# EAGLE board mcboard (EAGLE 9.6.2)
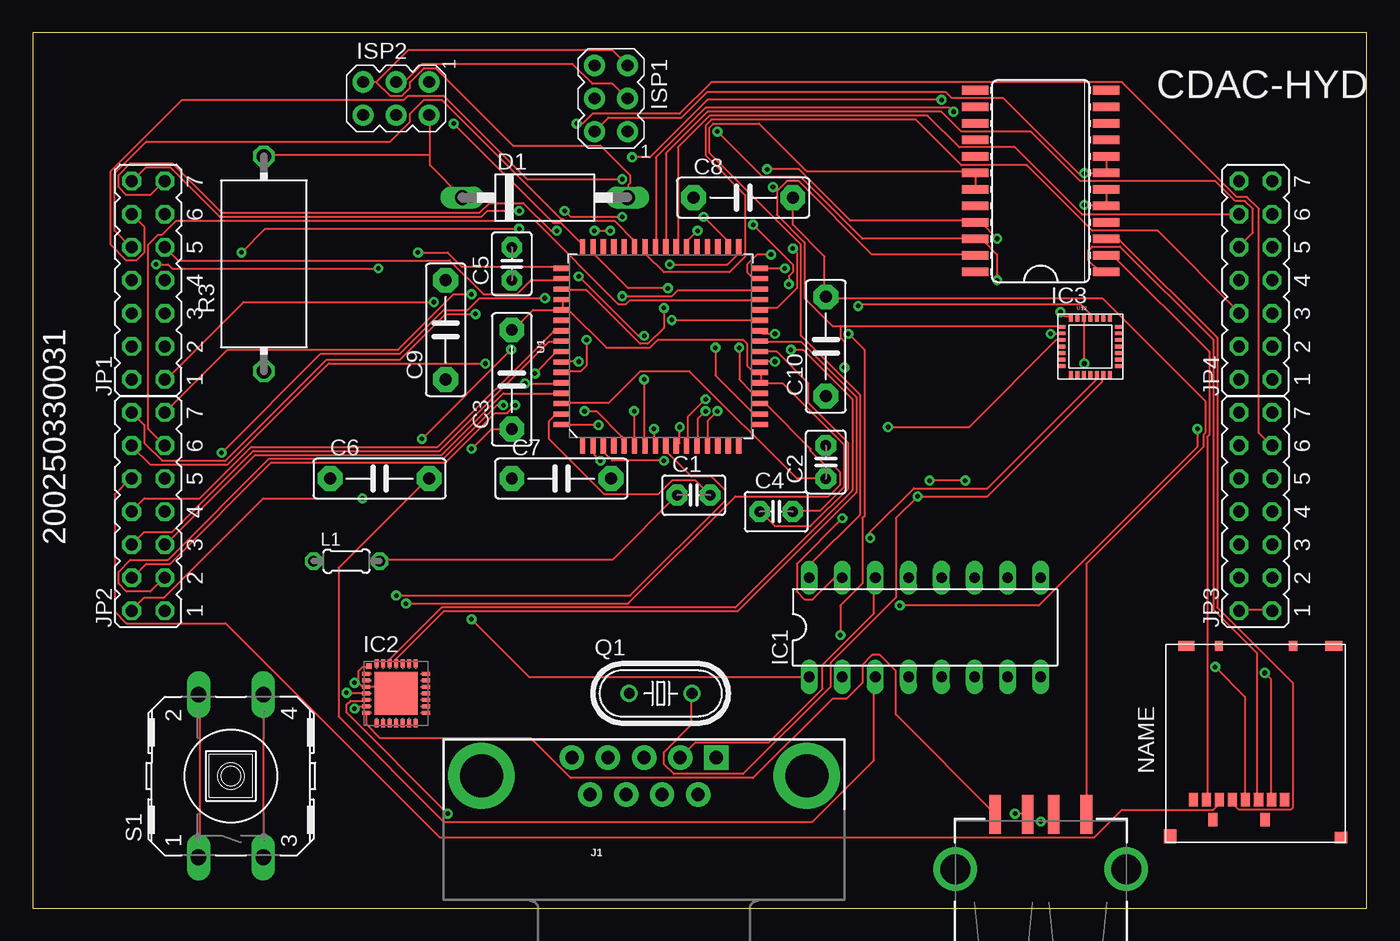
[diagram p0: board, top side]
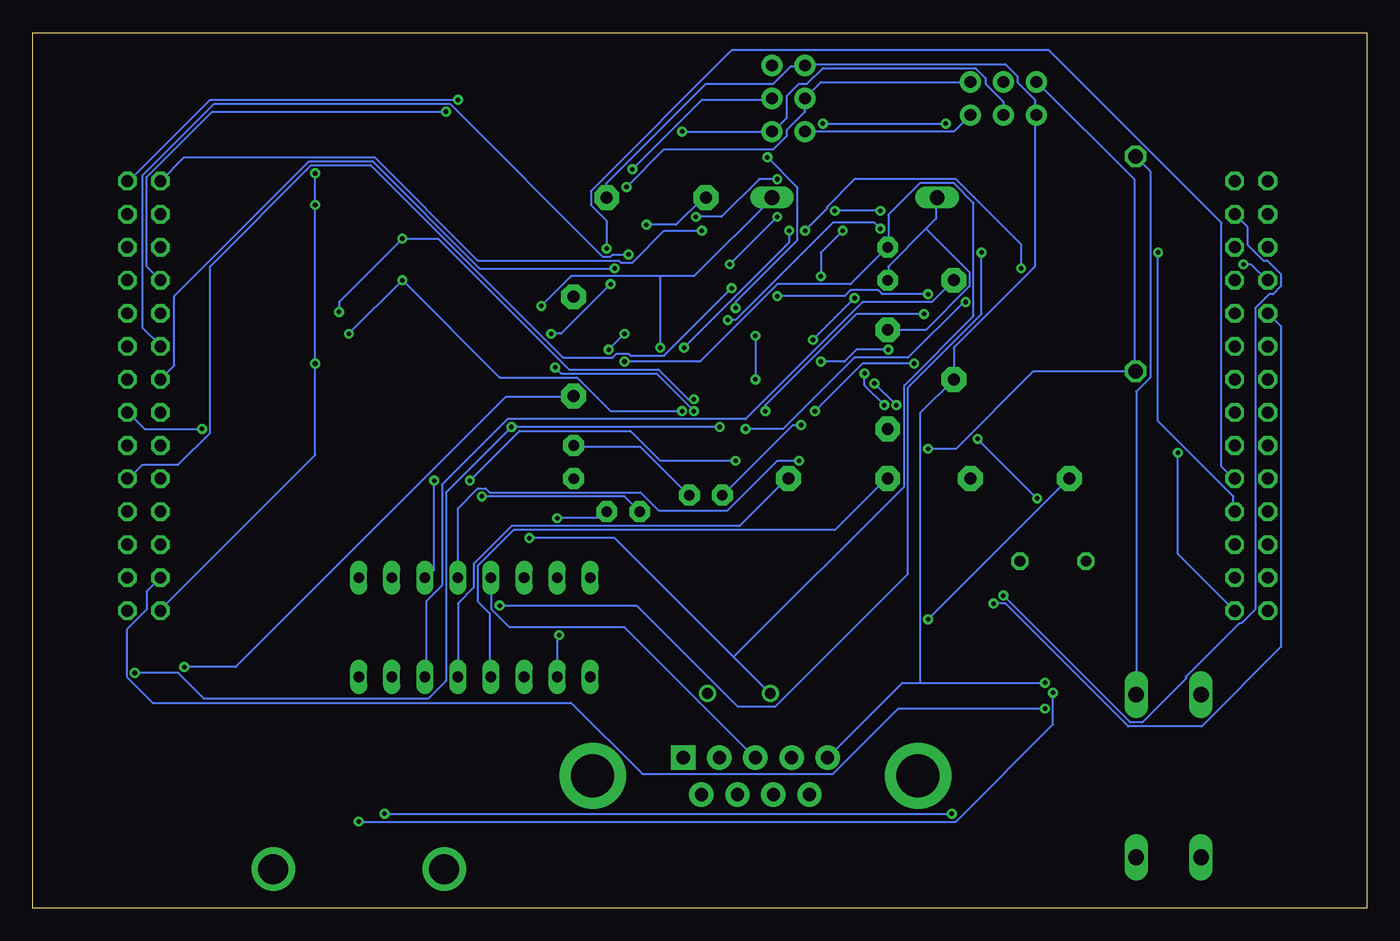
[diagram p1: board, bottom side, seen from below]

Size 102.54 x 67.3 mm. Coordinates in mm from the lower left corner, seen from the top.
Outline: 0,0 102.54,0 102.54,67.3 0,67.3 0,0
Copper layers (1*16): Top 0.035mm / dielectric 1.5mm / Bottom 0.035mm
Design rules "default": minimum track width 6mil, minimum drill 0.35mm, track to track 6mil, track to pad 6mil, pad to pad 6mil, via to via 6mil, smd to smd 6mil, copper to edge 40mil, drill to drill 6mil, minimum pad ring 10mil, minimum via ring 8mil, stop-mask expansion 4mil, vias tented up to drill 0mil, thermal gap 10mil

## Footprints (pad centres in the part's own frame; a part is rotated, then mirrored left to right if it is on the bottom)
C2.5-3 = drill 0.813 pad 1.6 octagon: 1 -1.27,0; 2 1.27,0
C7.5B3 = drill 0.914 pad 1.905 octagon: 1 -3.81,0; 2 3.81,0
DO15-12 = drill 1.118 long: A 6.35,0; C -6.35,0
DIL16 = drill 0.813 long: 1 -8.89,-3.81; 2 -6.35,-3.81; 3 -3.81,-3.81; 4 -1.27,-3.81; 5 1.27,-3.81; 6 3.81,-3.81; 7 6.35,-3.81; 8 8.89,-3.81; 9 8.89,3.81; 10 6.35,3.81; 11 3.81,3.81; 12 1.27,3.81; 13 -1.27,3.81; 14 -3.81,3.81; 15 -6.35,3.81; 16 -8.89,3.81
MLP28 = smd 0.6 x 0.3: 1 -2.3,1.5; 2 -2.3,1; 3 -2.3,0.5; 4 -2.3,0; 5 -2.3,-0.5; 6 -2.3,-1; 7 -2.3,-1.5; 15 2.3,-1.5; 16 2.3,-1; 17 2.3,-0.5; 18 2.3,0; 19 2.3,0.5; 20 2.3,1; 21 2.3,1.5 | smd 0.3 x 0.6: 8 -1.5,-2.3; 9 -1,-2.3; 10 -0.5,-2.3; 11 0,-2.3; 12 0.5,-2.3; 13 1,-2.3; 14 1.5,-2.3; 22 1.5,2.3; 23 1,2.3; 24 0.5,2.3; 25 0,2.3; 26 -0.5,2.3; 27 -1,2.3; 28 -1.5,2.3 | smd 3.3 x 3.3: EXP 0,0 | smd 0.435 x 0.435: M -2.103,2.103
SO24W = smd 0.66 x 2.032: 1 -6.985,-5.029; 2 -5.715,-5.029; 3 -4.445,-5.029; 4 -3.175,-5.029; 5 -1.905,-5.029; 6 -0.635,-5.029; 7 0.635,-5.029; 8 1.905,-5.029; 9 3.175,-5.029; 10 4.445,-5.029; 11 5.715,-5.029; 12 6.985,-5.029; 13 6.985,5.029; 14 5.715,5.029; 15 4.445,5.029; 16 3.175,5.029; 17 1.905,5.029; 18 0.635,5.029; 19 -0.635,5.029; 20 -1.905,5.029; 21 -3.175,5.029; 22 -4.445,5.029; 23 -5.715,5.029; 24 -6.985,5.029
AVRISP = drill 0.9 pad 1.626: 1 -1.27,2.54; 2 1.27,2.54; 3 -1.27,0; 4 1.27,0; 5 -1.27,-2.54; 6 1.27,-2.54
DB9 = drill 1.016 pad 1.88 square: 1 -5.54,-1.42 | drill 1.016 pad 1.88: 2 -2.77,-1.42; 3 0,-1.42; 4 2.77,-1.42; 5 5.54,-1.42; 6 -4.15,1.42; 7 -1.38,1.42; 8 1.38,1.42; 9 4.15,1.42 | drill 3.302 pad 5.08: G1 -12.5,0; G2 12.5,0
USB-A-S-SILK-FEMALE = smd 3 x 0.9: D+ 7.212,-1; D- 7.212,1; GND 7.212,-3.5; VBUS 7.212,3.5 | drill 2.311: SHLD1 3,-6.566; SHLD2 3,6.566
JP7Q = drill 0.914 octagon: 1 -7.62,-1.27; 2 -7.62,1.27; 3 -5.08,-1.27; 4 -5.08,1.27; 5 -2.54,-1.27; 6 -2.54,1.27; 7 0,-1.27; 8 0,1.27; 9 2.54,-1.27; 10 2.54,1.27; 11 5.08,-1.27; 12 5.08,1.27; 13 7.62,-1.27; 14 7.62,1.27
0204/5 = drill 0.813 octagon: 1 -2.54,0; 2 2.54,0
HC49U-V = drill 0.813: 1 -2.413,0; 2 2.413,0
VTA55 = drill 1.1 octagon: 1 -8.255,0; 2 8.255,0
RACON12 = drill 1.194 long: 1 -6.248,2.489; 2 6.248,2.489; 3 -6.248,-2.489; 4 6.248,-2.489
TQFP64_14X14MM = smd 0.4 x 1.27: 1 -6,-7.6; 2 -5.2,-7.6; 3 -4.4,-7.6; 4 -3.6,-7.6; 5 -2.8,-7.6; 6 -2,-7.6; 7 -1.2,-7.6; 8 -0.4,-7.6; 9 0.4,-7.6; 10 1.2,-7.6; 11 2,-7.6; 12 2.8,-7.6; 13 3.6,-7.6; 14 4.4,-7.6; 15 5.2,-7.6; 16 6,-7.6; 33 6,7.6; 34 5.2,7.6; 35 4.4,7.6; 36 3.6,7.6; 37 2.8,7.6; 38 2,7.6; 39 1.2,7.6; 40 0.4,7.6; 41 -0.4,7.6; 42 -1.2,7.6; 43 -2,7.6; 44 -2.8,7.6; 45 -3.6,7.6; 46 -4.4,7.6; 47 -5.2,7.6; 48 -6,7.6 | smd 1.27 x 0.4: 17 7.6,-6; 18 7.6,-5.2; 19 7.6,-4.4; 20 7.6,-3.6; 21 7.6,-2.8; 22 7.6,-2; 23 7.6,-1.2; 24 7.6,-0.4; 25 7.6,0.4; 26 7.6,1.2; 27 7.6,2; 28 7.6,2.8; 29 7.6,3.6; 30 7.6,4.4; 31 7.6,5.2; 32 7.6,6; 49 -7.6,6; 50 -7.6,5.2; 51 -7.6,4.4; 52 -7.6,3.6; 53 -7.6,2.8; 54 -7.6,2; 55 -7.6,1.2; 56 -7.6,0.4; 57 -7.6,-0.4; 58 -7.6,-1.2; 59 -7.6,-2; 60 -7.6,-2.8; 61 -7.6,-3.6; 62 -7.6,-4.4; 63 -7.6,-5.2; 64 -7.6,-6
SD-CARD = smd 0.7 x 1.05: P$1 2.225,3.275; P$2 1.225,3.275; P$3 0.225,3.275; P$4 -0.775,3.275; P$5 -1.775,3.275; P$6 -2.775,3.275; P$7 -3.775,3.275; P$8 -4.775,3.275; P$9 0.725,1.725; P$10 -3.275,1.725 | smd 0.95 x 1.1: P$11 -6.575,0.45 | smd 0.95 x 0.9: P$12 6.575,0.35 | smd 1.2 x 0.75: P$13 -5.325,15.075 | smd 1.3 x 0.75: P$14 6.025,15.075 | smd 0.65 x 0.75: P$15 2.875,15.075; P$16 -2.825,15.075
CC2520 = smd 0.6 x 0.3: P$1 -2.2,1.5; P$2 -2.2,1; P$3 -2.2,0.5; P$4 -2.2,0; P$5 -2.2,-0.5; P$6 -2.2,-1; P$7 -2.2,-1.5; P$15 2.2,-1.5; P$16 2.2,-1; P$17 2.2,-0.5; P$18 2.2,0; P$19 2.2,0.5; P$20 2.2,1; P$21 2.2,1.5 | smd 0.3 x 0.6: P$8 -1.5,-2.2; P$9 -1,-2.2; P$10 -0.5,-2.2; P$11 0,-2.2; P$12 0.5,-2.2; P$13 1,-2.2; P$14 1.5,-2.2; P$22 1.5,2.2; P$23 1,2.2; P$24 0.5,2.2; P$25 0,2.2; P$26 -0.5,2.2; P$27 -1,2.2; P$28 -1.5,2.2

## Placement (x,y rotation side)
C1  [C2.5-3]  50.8,31.75 0 top
C2  [C2.5-3]  60.96,34.29 90 top
C3  [C7.5B3]  36.83,40.64 90 top
C4  [C2.5-3]  57.15,30.48 0 top
C5  [C2.5-3]  36.83,49.53 90 top
C6  [C7.5B3]  26.67,33.02 0 top
C7  [C7.5B3]  40.64,33.02 0 top
C8  [C7.5B3]  54.61,54.61 0 top
C9  [C7.5B3]  31.75,44.45 90 top
C10  [C7.5B3]  60.96,43.18 90 top
D1  EGP20A  [DO15-12]  39.37,54.61 0 top
IC1  MAX232  [DIL16]  68.58,21.59 0 top
IC2  CP2101  [MLP28]  27.94,16.51 0 top
IC3  74AC11244D  [SO24W]  77.47,55.88 90 top
ISP1  AVRISP-6  [AVRISP]  44.45,62.23 180 top
ISP2  AVRISP-6  [AVRISP]  27.94,62.23 270 top
J1  [DB9]  46.99,10.16 180 top
J2  USB_A_SMT_FEMALE  [USB-A-S-SILK-FEMALE]  77.47,0 90 top
JP1  [JP7Q]  8.89,48.26 90 top
JP2  [JP7Q]  8.89,30.48 90 top
JP3  [JP7Q]  93.98,30.48 90 top
JP4  [JP7Q]  93.98,48.26 90 top
L1  [0204/5]  24.13,26.67 0 top
Q1  [HC49U-V]  48.26,16.51 0 top
R3  [VTA55]  17.78,49.53 90 top
S1  RACON12  [RACON12]  15.24,10.16 90 top
U1  ATMEGA128-SMD  [TQFP64_14X14MM]  48.26,43.18 0 top
U$1  SD-CARD  [SD-CARD]  93.98,5.08 0 top
U$2  [CC2520]  81.28,43.18 0 top

## Library data of the parts
C1-C10 = capacitor-wima
D1 = diode
IC1 = maxim; MF: MAXIM; MPN: MAX232ACPE+; OC_FARNELL: 9723773; OC_NEWARK: 68K4544
IC2 = silabs; MF: FARNELL; MPN: CP2102-GM; OC_FARNELL: 9282130; OC_NEWARK: 30K5635
IC3 = 74ac-logic
ISP1 ISP2 = adafruit
J1 = SparkFun-Connectors; PROD_ID: CONN-08194
J2 = SparkFun-Connectors; PROD_ID: CONN-09520; SF_ID: PRT-09011
JP1-JP4 = jumper
L1 = rcl; SPICEPREFIX: L
Q1 = crystal; OC_FARNELL: 1666969; OC_NEWARK: unknown
R3 = rcl; SPICEPREFIX: R
S1 = switch-misc
U1 = SparkFun-IC-Microcontroller
U$1 = SD-CARD
U$2 = CC2520

## Nets
3.3V: C10.1 U$1.P$4
5V: C3.2 C4.2 C5.1 D1.C IC1.15 IC3.5 IC3.6 IC3.7 IC3.8 ISP1.2 ISP2.2 JP3.1 JP3.2 R3.2 S1.3 S1.4 U1.21 U1.22 U1.52 U1.53 U$2.P$26
GND: C8.2 C9.1 C10.2 IC2.3 IC2.EXP IC2.M ISP1.6 ISP2.6 J1.5 J2.GND
N$1: C2.1 U1.62
N$2: C1.2 C2.2 U1.63
N$3: C1.1 L1.2 U1.64
N$4: L1.1
N$5: S1.1 S1.2
N$6: C6.1 IC1.1
N$7: U1.10 U$1.P$2 U$2.P$3
N$8: C4.1 Q1.2 U1.24 U$2.P$13
N$9: C5.2 Q1.1 U1.23 U$2.P$12
N$10: IC3.22 ISP1.1 ISP2.4 U1.13 U$2.P$2
N$11: IC3.23 ISP1.4 ISP2.1 U1.12 U$2.P$1
N$12: IC3.21 ISP1.3 ISP2.3 U1.11 U$2.P$28
N$13: C9.2 IC1.6
N$14: C8.1 IC1.2
N$15: C7.1 IC1.4
N$16: C6.2 IC1.3
N$17: C7.2 IC1.5
N$18: IC2.25 U1.25
N$19: IC1.11 U1.3
N$20: IC1.12 U1.2
N$21: IC3.3 U$1.P$5
N$22: JP2.5 U1.61
N$23: IC2.5 J2.D-
N$24: JP2.3 U1.60
N$25: IC2.4 J2.D+
N$26: IC2.7 J2.VBUS
N$27: IC1.14 J1.2
N$28: IC1.13 J1.3
N$29: C3.1 D1.A ISP1.5 ISP2.5 R3.1 U1.20 U$2.P$25
N$30: IC2.26 U1.26
N$31: IC3.1 U$1.P$3
N$32: IC3.2 U$1.P$7
N$33: JP2.12 U1.5
N$34: JP2.14 U1.6
N$35: JP4.2 U1.32
N$36: JP4.4 U1.31
N$37: JP4.12 U1.39
N$38: JP4.10 U1.40
N$39: JP4.8 U1.41
N$40: JP4.6 U1.42
N$41: JP4.13 U1.51
N$42: JP1.11 U1.9
N$43: JP1.1 U1.8
N$44: JP1.13 U1.7
N$45: JP1.9 U1.50
N$46: JP4.14 U1.38
N$48: JP1.14 U1.33
N$49: JP1.12 U1.34
N$50: JP1.10 U1.43
N$51: JP1.8 U1.18
N$52: JP1.6 U1.19
N$53: JP2.13 U1.30
N$54: JP2.11 U1.29
N$55: JP2.9 U1.28
N$56: JP2.7 U1.27
N$57: JP2.1 U1.59
N$58: JP2.2 U1.58
N$59: JP2.4 U1.57
N$60: JP2.6 U1.56
N$61: JP2.8 U1.55
N$62: JP2.10 U$1.P$6
N$63: JP3.13 U1.49
N$64: JP3.11 U1.48
N$65: JP3.9 U1.47
N$67: IC2.6 JP3.4
VCC: IC1.16 IC3.18 IC3.19

## Tracks (layer width: path | path; a pad name or v marks a point on that pad's centre or on a via)
3.3V  (via drill 0.35)
  Top 0.152: v90.88,18.54 93.17,16.26 93.17,8.48 U$1.P$4
  Bottom 0.152: v90.88,18.54 86.92,18.54 66.19,39.27 61.01,39.27 C10.1
5V  (via drill 0.35)
  Top 0.152: IC3.8 IC3.7 82.5,56.49 v80.82,56.49 80.37,56.49 74.57,62.28 70.61,62.28 70.15,62.74 51.87,62.74 49.89,60.76 44.25,60.76 ISP1.2 | IC3.6 82.5,54.05 | v80.82,41.86 80.82,45.36 U$2.P$26 | v80.82,54.05 82.5,54.05 | 82.5,54.05 IC3.5 | JP3.1 95.15,22.96 92.71,22.96 JP3.2 | C4.2 58.42,30.58 60.55,30.58 62.38,32.41 62.38,35.61 57.66,40.33 55.98,40.33 U1.21 55.98,40.49 55.98,41.1 U1.22 55.83,41.25 55.37,41.25 54.91,41.71 54.91,43.38 54.61,43.69 48.06,43.69 47.45,43.08 44.09,43.08 41.2,45.97 40.74,45.97 U1.53 | IC1.15 61.62,25.4 59.94,23.72 59.33,23.72 58.73,24.33 58.73,26.47 v62.23,29.97 | S1.4 S1.3 | U1.53 40.74,46.13 40.74,46.74 U1.52 | U1.53 40.59,45.97 38.46,45.97 36.93,44.45 C3.2 | 30.53,57.86 30.53,57.1 D1.C | 30.53,57.86 30.53,60.91 ISP2.2 | 30.53,57.86 17.88,57.86 R3.2
  Bottom 0.152: JP3.2 92.71,22.96 80.82,34.85 v80.82,41.86 v80.82,54.05 v80.82,56.49 | v62.23,29.97 58.88,29.97 58.42,30.43 C4.2 | 33.88,52.22 33.12,52.98 33.12,54.51 D1.C | 33.88,52.22 36.78,49.33 36.78,48.26 C5.1 | ISP1.2 31.75,59.69 ISP2.2 | C3.2 33.88,44.45 30.53,47.8 30.53,48.87 33.88,52.22 | S1.4 17.73,39.73 16.66,40.79 16.66,56.64 17.73,57.71 R3.2
GND  (via drill 0.35)
  Top 0.152: 25.04,17.32 25.04,18.24 25.35,18.54 25.81,18.54 IC2.M | 25.04,17.32 25.35,17.02 25.5,17.02 IC2.3 25.65,17.02 27.48,17.02 27.94,16.56 IC2.EXP | v24.74,17.32 25.04,17.32 | J2.GND 80.97,7.26 80.97,26.47 89.97,35.46 89.97,36.37 90.12,36.52 90.12,38.96 82.19,46.89 61.01,46.89 C10.2 60.86,47.04 60.86,50.09 58.42,52.53 C8.2
  Bottom 0.152: 34.34,17.32 35.71,17.32 41.35,11.68 J1.5 | 34.34,17.32 v24.74,17.32 | 34.34,17.32 34.34,38.05 C9.1 31.75,43.08 25.5,49.33 25.5,60.91 ISP2.6 25.5,61.06 25.5,62.13 26.87,63.5 26.87,63.96 27.79,64.87 43.18,64.87 ISP1.6 43.18,64.72 44.25,64.72 45.62,63.35 50.8,63.35 58.42,55.73 C8.2
N$1
  Top 0.152: C2.1 58.73,33.02 50.49,41.25 46.69,41.25 44.25,38.81 40.74,38.81 U1.62
N$2
  Top 0.152: C1.2 50.95,32.87 49.12,32.87 48.06,31.8 43.94,31.8 39.68,36.07 39.68,37.44 40.13,37.9 40.59,37.9 U1.63
  Bottom 0.152: C2.2 60.86,35.46 55.83,35.46 52.17,31.8 C1.2
N$3  (via drill 0.35)
  Top 0.152: v43.48,37.13 40.74,37.13 U1.64 | C1.1 44.55,26.77 26.72,26.77 L1.2
  Bottom 0.152: v43.48,37.13 44.09,37.13 49.43,31.8 C1.1
N$5
  Top 0.152: S1.1 12.85,3.91 12.85,16.41 S1.2
N$6  (via drill 0.35)
  Top 0.152: IC1.1 38.15,17.78 v33.73,22.2
  Bottom 0.152: v33.73,22.2 22.91,33.02 C6.1
N$7  (via drill 0.35)
  Top 0.152: v65.73,36.98 71.98,36.98 78.69,43.69 78.99,43.69 U$2.P$3 | v49.73,36.98 49.73,35.76 49.58,35.61 U1.10 | v94.69,18.09 95.15,17.63 95.15,8.48 U$1.P$2
  Bottom 0.152: v49.73,36.98 v65.73,36.98 70.76,31.95 70.76,17.48 72.14,16.1 89.36,16.1 91.34,18.09 v94.69,18.09
N$8  (via drill 0.35)
  Top 0.152: U$2.P$13 82.19,40.95 82.19,40.49 73.35,31.65 v68.02,31.65 66.34,29.97 66.34,23.88 61.32,18.85 61.32,17.02 54.61,10.31 49.28,10.31 48.51,11.07 48.51,11.99 50.65,14.12 50.65,16.41 Q1.2 | U1.24 55.98,42.77 57.2,42.77 59.64,40.33 59.64,38.81 62.69,35.76 62.69,32.26 59.79,29.36 57.05,29.36 55.98,30.43 C4.1
  Bottom 0.152: v68.02,31.65 57.05,31.65 C4.1
N$9  (via drill 0.35)
  Top 0.152: v57.05,42.01 55.98,42.01 U1.23 | v64.36,28.45 64.36,28.91 67.72,32.26 73.35,32.26 81.74,40.64 81.74,40.95 U$2.P$12
  Bottom 0.152: v57.05,42.01 51.26,42.01 45.31,47.95 39.68,47.95 C5.2 36.78,50.85 36.78,53.29 34.34,55.73 31.75,55.73 30.23,54.2 30.23,45.52 35.56,40.18 35.56,32.41 48.67,19.3 | v64.36,28.45 57.81,28.45 48.67,19.3 | 48.67,19.3 45.92,16.56 Q1.1
N$10  (via drill 0.35)
  Top 0.152: v78.23,44.14 78.99,44.14 U$2.P$2 | v74.12,48.26 74.12,50.24 73.05,51.31 72.44,51.31 IC3.22 72.44,51.46 63.75,51.46 59.03,56.18 56.13,56.18 v52.63,59.69 | v52.63,38.2 51.87,37.44 51.87,35.61 U1.13
  Bottom 0.152: ISP2.4 27.94,61.98 29.31,63.35 29.31,63.8 30.07,64.57 41.81,64.57 43.03,63.35 43.64,63.35 44.55,62.43 44.55,60.76 45.62,59.69 ISP1.1 v52.63,59.69 | v78.23,44.14 v74.12,48.26 66.65,40.79 60.71,40.79 58.12,38.2 v52.63,38.2
N$11  (via drill 0.35)
  Top 0.152: 62.08,44.75 61.47,44.75 59.33,46.89 59.33,51.16 57.2,53.29 57.2,55.12 | 62.08,44.75 78.99,44.75 U$2.P$1 | 57.2,55.12 57.96,55.88 58.88,55.88 64.52,50.24 72.44,50.24 IC3.23 | v51.71,38.2 51.11,37.59 51.11,35.61 U1.12 | v62.38,41.55 62.38,43.54 62.08,43.84 62.08,44.75 | 57.2,55.12 v56.9,55.42
  Bottom 0.152: ISP2.1 41.96,63.5 43.18,62.28 ISP1.4 43.18,61.21 44.55,59.84 44.55,59.38 45.62,58.32 54,58.32 v56.9,55.42 | v51.71,38.2 54.61,41.1 61.93,41.1 v62.38,41.55
N$12  (via drill 0.35)
  Top 0.152: ISP2.3 28.55,63.5 29.92,64.87 41.5,64.87 43.03,63.35 44.55,63.35 45.62,62.28 ISP1.3 | v78.99,45.82 79.3,45.52 79.76,45.52 U$2.P$28 | v74.12,51.46 72.9,52.68 72.44,52.68 IC3.21 72.44,52.83 62.84,52.83 58.88,56.79 v56.44,56.79 | v51.71,39.12 50.34,37.74 50.34,35.61 U1.11
  Bottom 0.152: v78.99,45.82 78.99,46.58 v74.12,51.46 71.37,51.46 61.32,41.4 54.46,41.4 52.17,39.12 v51.71,39.12 | v56.44,56.79 51.11,62.13 45.77,62.13 ISP1.3
N$13
  Bottom 0.152: C9.2 33.43,46.58 38.76,46.58 47.75,37.59 66.04,37.59 71.07,32.56 71.07,24.79 72.29,23.57 72.29,17.78 IC1.6
N$14  (via drill 0.35)
  Top 0.152: v62.08,20.98 62.08,23.27 63.75,24.94 63.75,29.97 63.91,30.12 63.91,42.93 v62.69,44.14 | v58.12,47.95 58.12,48.56 58.42,48.87 58.42,49.48 v55.37,52.53
  Bottom 0.152: IC1.2 62.23,20.83 v62.08,20.98 | v62.69,44.14 61.93,44.14 v58.12,47.95 | v55.37,52.53 53.09,52.53 51.11,54.51 50.8,54.51 C8.1
N$15
  Bottom 0.152: IC1.4 67.41,17.78 67.41,22.66 68.33,23.57 68.33,26.31 65.58,29.06 40.89,29.06 36.93,33.02 C7.1
N$16
  Top 0.152: IC1.3 64.67,17.78 64.67,11.38 59.94,6.65 31.6,6.65 23.52,14.73 23.52,26.16 30.38,33.02 C6.2
N$17
  Bottom 0.152: IC1.5 69.85,23.42 68.63,24.64 68.63,26.47 65.73,29.36 48.21,29.36 44.55,33.02 C7.2
N$18
  Top 0.152: IC2.25 27.94,19.15 31.6,22.81 54.15,22.81 63.3,31.95 63.3,39.27 59.03,43.54 55.98,43.54 U1.25
N$19  (via drill 0.35)
  Top 0.152: v48.51,34.39 44.55,34.39 43.94,35 43.94,35.46 U1.3 | v71.68,32.87 v68.94,32.87
  Bottom 0.152: v48.51,34.39 54.3,34.39 56.59,36.68 65.13,36.68 v68.94,32.87 | v71.68,32.87 71.68,26.01 72.29,25.4 IC1.11
N$20  (via drill 0.35)
  Top 0.152: v43.64,34.39 43.18,34.85 43.18,35.46 U1.2
  Bottom 0.152: v43.64,34.39 45.31,34.39 49.12,30.58 54.46,30.58 55.83,31.95 67.41,31.95 67.72,32.26 68.33,32.26 69.85,30.73 IC1.12
N$21
  Top 0.152: U$1.P$5 92.25,8.33 92.25,8.03 92.71,7.57 96.67,7.57 96.82,7.72 96.82,17.32 91.03,23.11 91.03,43.84 83.57,51.31 82.5,51.31 IC3.3
N$22
  Top 0.152: U1.61 40.59,39.57 36.17,39.57 31.45,34.85 17.12,34.85 10.26,27.99 JP2.5
N$23  (via drill 0.35)
  Top 0.152: v31.9,7.26 24.13,15.04 24.13,15.65 24.44,15.95 25.5,15.95 IC2.5 | v75.49,7.26 76.4,7.26 J2.D-
  Bottom 0.152: v75.49,7.26 v31.9,7.26
N$24  (via drill 0.35)
  Top 0.152: v37.85,40.33 40.59,40.33 U1.60 | v36.17,38.66 35.71,38.66 31.6,34.54 18.19,34.54 10.41,26.77 7.52,26.77 6.6,25.86 6.6,24.94 7.21,24.33 9.04,24.33 10.11,25.4 JP2.3
  Bottom 0.152: v36.17,38.66 v37.85,40.33
N$25  (via drill 0.35)
  Top 0.152: v24.13,16.56 25.5,16.56 IC2.4 | v77.47,6.65 77.93,6.65 78.38,7.11 J2.D+
  Bottom 0.152: v24.13,16.56 24.13,14.12 31.6,6.65 v77.47,6.65
N$26
  Top 0.152: IC2.7 25.65,14.88 25.65,14.12 26.72,13.06 38.3,13.06 41.35,10.01 55.37,10.01 61.47,16.1 62.54,16.1 63.75,17.32 63.75,18.69 64.52,19.46 65.13,19.46 66.34,18.24 66.34,14.88 73.96,7.26 J2.VBUS
N$27
  Top 0.152: IC1.14 64.67,25.4 64.67,22.66 60.71,18.69 60.71,16.87 56.59,12.75 50.95,12.75 49.89,11.68 J1.2
N$28
  Bottom 0.152: IC1.13 67.26,25.4 67.26,22.96 65.89,21.59 57.05,21.59 46.99,11.53 J1.3
N$29  (via drill 0.35)
  Top 0.152: U$2.P$25 81.28,45.67 80.52,46.43 63.6,46.43 v63.45,46.28 | v54.3,43.08 54.3,40.64 55.22,39.73 55.83,39.73 U1.20 | 26.42,63.5 ISP2.5 | 26.42,63.5 28.85,65.94 44.55,65.94 ISP1.5 | C3.1 35.26,36.83 v33.73,35.31 | 26.42,63.5 27.48,62.43 28.4,62.43 29.01,63.04 29.01,63.5 30.07,64.57 30.99,64.57 36.93,58.62 43.64,58.62 45.92,56.34 45.92,55.73 45.77,55.57 45.77,54.66 D1.A
  Bottom 0.152: v63.45,46.28 61.16,48.56 54.3,48.56 | 54.3,48.56 51.71,48.56 45.77,54.51 D1.A | 54.3,48.56 v54.3,43.08 | ISP2.5 25.35,63.5 17.88,56.03 17.88,41.4 R3.1 17.88,41.25 25.65,41.25 31.6,35.31 v33.73,35.31
N$30  (via drill 0.35)
  Top 0.152: v58.27,42.93 59.18,42.93 62.99,39.12 62.99,32.11 54,23.11 31.45,23.11 27.48,19.15 27.48,18.85 IC2.26 | v57.05,44.14 56.13,44.14 55.98,44.3 U1.26
  Bottom 0.152: v57.05,44.14 v58.27,42.93
N$31
  Top 0.152: U$1.P$3 94.08,8.48 94.08,19.61 90.73,22.96 90.73,43.69 83.57,50.85 81.43,50.85 81.13,50.55 81.13,49.78 81.89,49.02 82.5,49.02 IC3.1
N$32
  Top 0.152: U$1.P$7 90.27,8.48 90.27,36.22 90.42,36.37 90.42,42.77 83.11,50.09 82.5,50.09 IC3.2
N$33  (via drill 0.35)
  Top 0.152: v42.42,38.2 43.33,38.2 45.31,36.22 45.31,35.61 U1.5 | v34.8,41.86 22.76,41.86 14.99,34.09 9.04,34.09 7.67,35.46 JP2.12
  Bottom 0.152: v42.42,38.2 38.76,41.86 v34.8,41.86
N$34  (via drill 0.35)
  Top 0.152: v46.23,38.2 46.23,35.61 U1.6 | v34.04,45.67 31.75,45.67 28.25,42.16 22.61,42.16 14.83,34.39 9.96,34.39 8.59,35.76 8.59,37.13 JP2.14
  Bottom 0.152: v46.23,38.2 46.23,38.66 39.22,45.67 v34.04,45.67
N$35  (via drill 0.35)
  Top 0.152: v57.81,49.17 55.98,49.17 U1.32
  Bottom 0.152: v57.81,49.17 68.17,49.17 76.4,57.4 81.28,57.4 91.64,47.04 91.64,41.71 JP4.2
N$36  (via drill 0.35)
  Top 0.152: v56.74,50.24 55.68,50.24 54.91,49.48 54.91,48.87 55.37,48.41 55.83,48.41 U1.31
  Bottom 0.152: v56.74,50.24 57.96,50.24 58.12,50.09 58.73,50.09 70.46,61.82 88.59,61.82 94.08,56.34 94.08,44.6 92.71,43.23 JP4.4
N$37
  Top 0.152: U1.39 49.58,50.85 49.58,58.47 52.02,60.91 68.78,60.91 71.22,58.47 75.49,58.47 80.67,53.29 92.71,53.29 JP4.12
N$38
  Top 0.152: U1.40 48.67,50.85 48.67,58.01 51.87,61.21 69.85,61.21 71.37,59.69 76.71,59.69 80.52,55.88 90.88,55.88 92.4,54.36 93.17,54.36 93.78,53.75 93.78,51.92 92.71,50.85 JP4.10
N$39  (via drill 0.35)
  Top 0.152: v70.76,61.21 70.46,61.52 51.71,61.52 47.9,57.71 47.9,50.85 U1.41
  Bottom 0.152: v70.76,61.21 88.75,61.21 93.78,56.18 93.78,49.33 JP4.8
N$40
  Top 0.152: U1.42 47.14,50.7 47.14,50.24 48.51,48.87 53.54,48.87 54.76,50.09 54.76,54.81 51.71,57.86 51.71,60.15 52.17,60.6 67.87,60.6 71.37,57.1 76.4,57.1 81.43,52.07 86.46,52.07 92.71,45.82 JP4.6
N$41  (via drill 0.35)
  Top 0.152: v48.51,46.13 48.51,44.6 47.3,43.38 46.69,43.38 42.57,47.5 40.74,47.5 U1.51 | v46.08,57.71 47.45,57.71 51.87,62.13 v69.85,62.13
  Bottom 0.152: v48.51,46.13 48.51,46.58 43.79,51.31 43.79,55.42 v46.08,57.71 | v69.85,62.13 88.9,62.13 95.15,55.88 JP4.13
N$42  (via drill 0.35)
  Top 0.152: v27.94,24.03 45.92,24.03 53.24,31.34 53.24,32.11 52.17,33.17 50.65,33.17 48.67,35.15 48.67,35.46 U1.9
  Bottom 0.152: v27.94,24.03 18.19,14.28 17.27,14.28 13.92,17.63 13.92,17.78 9.8,21.89 9.65,21.89 8.59,22.96 8.59,46.13 7.52,47.19 7.21,47.19 6.6,47.8 6.6,48.72 7.67,49.78 7.98,49.78 9.2,51 9.2,52.38 JP1.11
N$43  (via drill 0.35)
  Top 0.152: v47.75,36.83 47.75,35.61 U1.8 | v30.84,46.58 16.21,46.58 10.26,40.64 JP1.1
  Bottom 0.152: v47.75,36.83 44.86,36.83 39.37,42.32 35.26,42.32 30.99,46.58 v30.84,46.58
N$44  (via drill 0.35)
  Top 0.152: v46.99,40.64 46.99,35.61 U1.7 | v46.99,43.99 46.53,43.99 v41.96,48.56 | v40.28,52.07 39.83,52.07 37.69,54.2 35.1,54.2 34.34,53.44 14.53,53.44 10.72,57.25 7.52,57.25 6.6,56.34 6.6,55.42 7.21,54.81 9.04,54.81 10.11,55.88 JP1.13
  Bottom 0.152: v46.99,43.99 v46.99,40.64 | v41.96,48.56 41.96,50.39 v40.28,52.07
N$45
  Top 0.152: JP1.9 11.18,49.78 32.05,49.78 34.65,47.19 37.24,47.19 38.3,48.26 40.59,48.26 U1.50
N$46  (via drill 0.35)
  Top 0.152: v51.11,52.07 50.34,51.31 50.34,50.85 U1.38
  Bottom 0.152: v51.11,52.07 54,52.07 56.44,49.63 57.35,49.63 57.51,49.78 68.33,49.78 76.25,57.71 90.88,57.71 JP4.14
N$48  (via drill 0.35)
  Top 0.152: v48.97,49.48 53.39,49.48 54.15,50.24 54.15,50.7 U1.33 | v45.31,53.14 41.35,53.14 v40.89,53.59 | v37.39,53.59 34.95,53.59 34.49,53.14 14.38,53.14 10.57,56.95 8.74,56.95 7.67,55.88 JP1.14
  Bottom 0.152: v45.31,53.14 v48.97,49.48 | v37.39,53.59 v40.89,53.59
N$49  (via drill 0.35)
  Top 0.152: v51.56,53.14 53.39,51.31 53.39,50.85 U1.34 | v45.31,56.03 38,56.03 31.6,62.43 28.85,62.43 28.55,62.13 11.48,62.13 5.99,56.64 5.99,51 7.21,49.78 7.98,49.78 8.59,50.39 8.59,52.38 JP1.12
  Bottom 0.152: v51.56,53.14 49.58,53.14 46.69,56.03 v45.31,56.03
N$50
  Top 0.152: U1.43 46.23,50.85 46.23,51.31 44.7,52.83 40.89,52.83 40.74,52.98 40.59,52.98 31.45,62.13 30.07,62.13 29.01,61.06 29.01,60.45 27.48,58.93 8.74,58.93 6.3,56.49 6.3,52.07 7.52,50.85 JP1.10
N$51  (via drill 0.35)
  Top 0.152: v52.48,43.08 52.48,40.95 55.37,38.05 55.83,38.05 U1.18 | v43.18,52.07 v44.4,52.07 | v26.57,49.17 10.72,49.17 10.41,49.48 v9.5,49.48
  Bottom 0.152: v52.48,43.08 44.4,51.16 v44.4,52.07 | v43.18,52.07 41.5,53.75 41.5,53.9 39.37,56.03 31.6,56.03 26.57,51 v26.57,49.17 | v9.5,49.48 8.89,49.48 7.67,48.26 JP1.8
N$52  (via drill 0.35)
  Top 0.152: v28.7,23.42 45.77,23.42 54,31.65 61.16,31.65 62.08,32.56 62.08,33.48 61.47,34.09 60.86,34.09 59.79,35.15 59.79,35.31 56.44,38.66 55.98,38.66 U1.19
  Bottom 0.152: v28.7,23.42 27.79,23.42 18.34,13.97 12.7,13.97 6.6,20.07 6.6,44.75 7.52,45.67 JP1.6
N$53  (via drill 0.35)
  Top 0.152: v45.31,47.04 49.12,47.04 49.58,47.5 55.83,47.5 U1.30 | v33.73,47.19 32.36,47.19 28.09,42.93 14.99,42.93 JP2.13
  Bottom 0.152: v45.31,47.04 40.13,47.04 39.68,47.5 37.54,47.5 37.24,47.19 v33.73,47.19
N$54
  Top 0.152: JP2.11 8.89,36.83 8.89,51 9.65,51.76 9.96,51.76 11.02,52.83 38.61,52.83 45.01,46.43 45.62,46.43 45.92,46.74 55.83,46.74 U1.29
N$55  (via drill 0.35)
  Top 0.152: v58.42,50.7 58.73,50.39 58.73,47.65 57.2,46.13 55.98,46.13 U1.28
  Bottom 0.152: v58.42,50.7 58.42,52.83 59.64,54.05 59.64,55.12 48.82,65.94 24.44,65.94 11.18,52.68 11.18,33.93 10.26,33.02 JP2.9
N$56  (via drill 0.35)
  Top 0.152: v49.12,45.21 55.83,45.21 U1.27 | v37.39,52.22 17.88,52.22 v16.05,50.39
  Bottom 0.152: v49.12,45.21 48.51,45.21 41.05,52.68 37.85,52.68 v37.39,52.22 | v16.05,50.39 16.05,37.44 10.26,31.65 10.26,30.58 JP2.7
N$57  (via drill 0.35)
  Top 0.152: v42.57,43.69 42.57,41.71 42.11,41.25 40.74,41.25 U1.59 | v39.37,46.89 34.34,46.89 33.43,45.97 31.6,45.97 28.25,42.62 22.15,42.62 v14.53,35
  Bottom 0.152: v39.37,46.89 v42.57,43.69 | v14.53,35 14.53,27.23 JP2.1
N$58  (via drill 0.35)
  Top 0.152: v41.96,42.01 40.74,42.01 U1.58 | v29.92,36.07 v36.78,42.93 | v25.35,31.5 17.73,31.5 10.11,23.88 8.59,23.88 7.67,22.96 JP2.2
  Bottom 0.152: v41.96,42.01 40.13,42.01 39.22,42.93 v36.78,42.93 | v25.35,31.5 v29.92,36.07
N$59  (via drill 0.35)
  Top 0.152: v38.61,41.1 40.28,42.77 40.59,42.77 U1.57 | v37.08,38.66 36.47,38.05 35.56,38.05 31.75,34.24 18.34,34.24 10.57,26.47 8.74,26.47 7.67,25.4 JP2.4
  Bottom 0.152: v38.61,41.1 38.61,40.18 v37.08,38.66
N$60
  Top 0.152: JP2.6 8.59,28.91 10.72,28.91 16.97,35.15 31.29,35.15 39.68,43.54 40.59,43.54 U1.56
N$61
  Top 0.152: U1.55 40.59,44.3 39.98,44.3 31.14,35.46 16.82,35.46 12.85,31.5 8.59,31.5 7.67,30.58 JP2.8
N$62
  Top 0.152: U$1.P$6 91.19,8.33 91.19,8.03 90.73,7.57 83.72,7.57 81.58,5.44 31.29,5.44 14.83,21.89 7.21,21.89 6.3,22.81 6.3,31.8 7.52,33.02 JP2.10
N$63  (via drill 0.35)
  Top 0.152: v29.62,50.39 31.9,50.39 32.97,49.33 40.59,49.33 U1.49 | v66.65,23.27 77.32,23.27 89.51,35.46 v89.51,36.83
  Bottom 0.152: v29.62,50.39 29.62,45.67 35.26,40.03 35.26,25.71 45.47,15.49 48.36,15.49 56.13,23.27 v66.65,23.27 | v89.51,36.83 93.93,36.83 95.15,38.05 JP3.13
N$64  (via drill 0.35)
  Top 0.152: v32.36,60.3 39.98,52.68 40.59,52.68 42.11,51.16 42.11,50.85 U1.48 | v41.81,60.3 42.27,60.3 43.03,61.06 49.73,61.06 52.17,63.5 83.72,63.5 92.56,54.66 93.32,54.66 94.23,53.75 94.23,36.52 95.15,35.61 JP3.11
  Bottom 0.152: v41.81,60.3 v32.36,60.3
N$65  (via drill 0.35)
  Top 0.152: v48.82,47.65 45.77,47.65 43.18,50.24 43.18,50.7 U1.47
  Bottom 0.152: v48.82,47.65 54,42.47 56.59,42.47 56.74,42.62 57.66,42.62 57.96,42.32 61.77,42.32 76.56,57.1 81.13,57.1 88.9,49.33 88.9,36.52 91.34,34.09 94.08,34.09 95.15,33.02 JP3.9
N$67  (via drill 0.35)
  Top 0.152: v24.74,15.34 24.89,15.49 25.5,15.49 IC2.6
  Bottom 0.152: v24.74,15.34 36.02,15.34 41.05,10.31 55.68,10.31 61.16,15.8 93.32,15.8 95.3,17.78 95.3,21.44 93.78,22.96 93.78,24.33 JP3.4
VCC
  Top 0.152: IC3.19 IC3.18 72.44,56.64 59.49,56.64 55.83,60.3 52.32,60.3 52.02,59.99 52.02,58.01 59.03,51 59.03,43.99 63.6,39.42 63.6,30.28 59.79,26.47 59.79,25.4 IC1.16

## Text on the board
tNames: CDAC-HYD | 200250330031